# EAGLE board PCB-SLIDER-C (EAGLE 6.2)
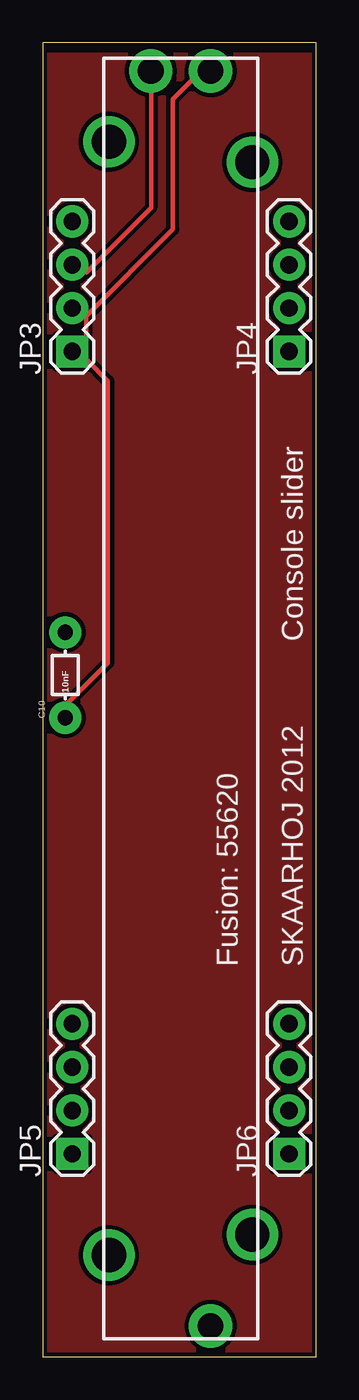
[diagram p0: board, top side]
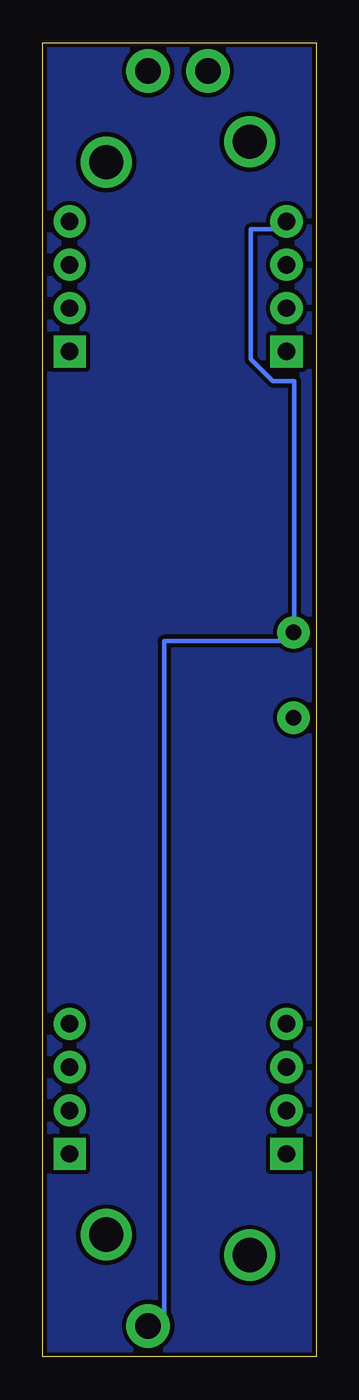
[diagram p1: board, bottom side, seen from below]

Size 16 x 76.96 mm. Coordinates in mm from the lower left corner, seen from the top.
Outline: 0,0 16,0 16,76.96 0,76.96 0,0
Copper layers (1*16): Top 0.035mm / dielectric 1.5mm / Bottom 0.035mm
Design rules: minimum track width 6mil, minimum drill 12mil, track to track 6mil, track to pad 6mil, pad to pad 6mil, via to via 6mil, smd to smd 0mil, copper to edge 10mil, drill to drill 10mil, minimum pad ring 10mil, minimum via ring 6mil, stop-mask expansion 2mil, vias tented up to drill 100mil, thermal gap 10mil
Net classes: 0 default: width 0.254 mm, clearance 0.254 mm; 1 Power: width 0.254 mm, clearance 0.254 mm

## Footprints (pad centres in the part's own frame; a part is rotated, then mirrored left to right if it is on the bottom)
AXIAL-5MM = drill 0.9 pad 1.88: P$1 -2.5,0; P$2 2.5,0
1X04 = drill 1.016 pad 1.88 square: 1 0,0 | drill 1.016 pad 1.88: 2 2.54,0; 3 5.08,0; 4 7.62,0
SLIDER60 = drill 1.5 pad 2.54: 1 -36.75,1.75; 2A -36.75,-1.75; 3 36.75,1.75 | drill 2: P$1 -31.4,4.2; P$2 31.4,4.2; P$3 32.6,-4.2; P$4 -32.6,-4.2

## Placement (x,y rotation side)
C10  10nF  [AXIAL-5MM]  1.32,39.93 90 top
JP3  SLIDER  [1X04]  1.73,58.88 90 top
JP4  [1X04]  14.43,58.88 90 top
JP5  [1X04]  1.73,11.89 90 top
JP6  [1X04]  14.43,11.89 90 top
U$22  SLIDER60  [SLIDER60]  8.08,38.56 270 top

## Library data of the parts
C10 JP3-JP6 = SparkFun
U$22 = SKAARHOJ

## Nets
N$2 [Power]: C10.P$1 JP3.1 JP3.2 U$22.1
N$3 [Power]: C10.P$2 JP3.4 U$22.3
N$132: JP3.3 U$22.2A

## Tracks (layer width: path | path; a pad name or v marks a point on that pad's centre or on a via)
GND\
  pour Top: 0,0 0,76.2 16,76.2 16,74.68 16,0
N$1
  pour Bottom: 0,76.96 16,76.96 16,0.15 0,0.15
N$2
  Top 0.254: C10.P$1 1.27,38.1 3.81,40.64 3.81,57.15 2.54,58.42 JP3.1 2.54,59.69 2.54,60.96 | 2.54,60.96 7.62,66.04 7.62,73.66 8.89,74.93 U$22.1 | 2.54,60.96 JP3.2
N$3
  Bottom 0.254: JP3.4 2.54,66.04 3.81,66.04 3.81,58.42 2.54,57.15 1.27,57.15 1.27,43.18 C10.P$2 1.27,41.91 8.89,41.91 8.89,2.54 U$22.3
N$132
  Top 0.254: JP3.3 2.54,63.5 6.35,67.31 6.35,74.93 U$22.2A

## Text on the board
_tsilk: Console slider | Fusion: 55620 | SKAARHOJ 2012